# Altium PCB PCM2706 Bus Powered USB DAC 2.PcbDoc
Units mil, origin at the board's own origin, x right, y up, seen from the top; angles counter-clockwise.
Board outline 6000 x 4000 mil, 2 copper layers (Top Layer, Bottom Layer); 37 components, 30 nets, 111 pads, 16 vias.
Unrouted connection lines stored in the file: 46.
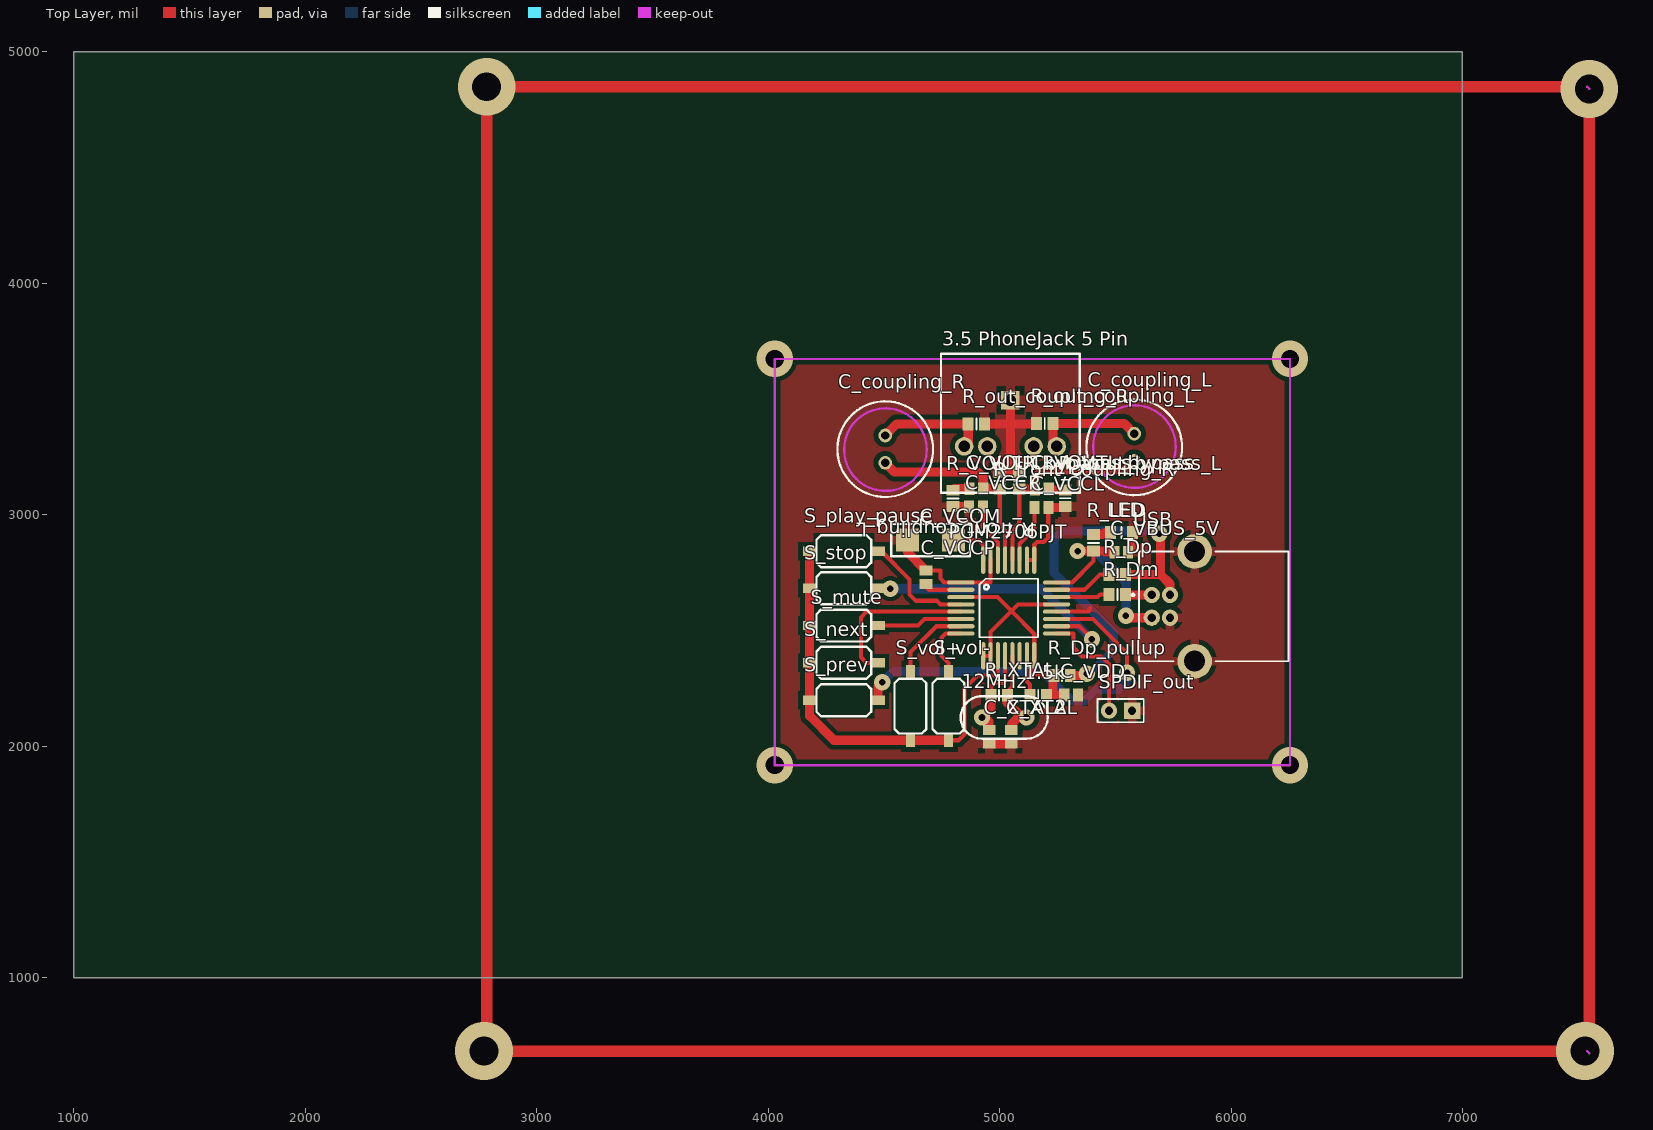
[diagram p0: Top Layer view]
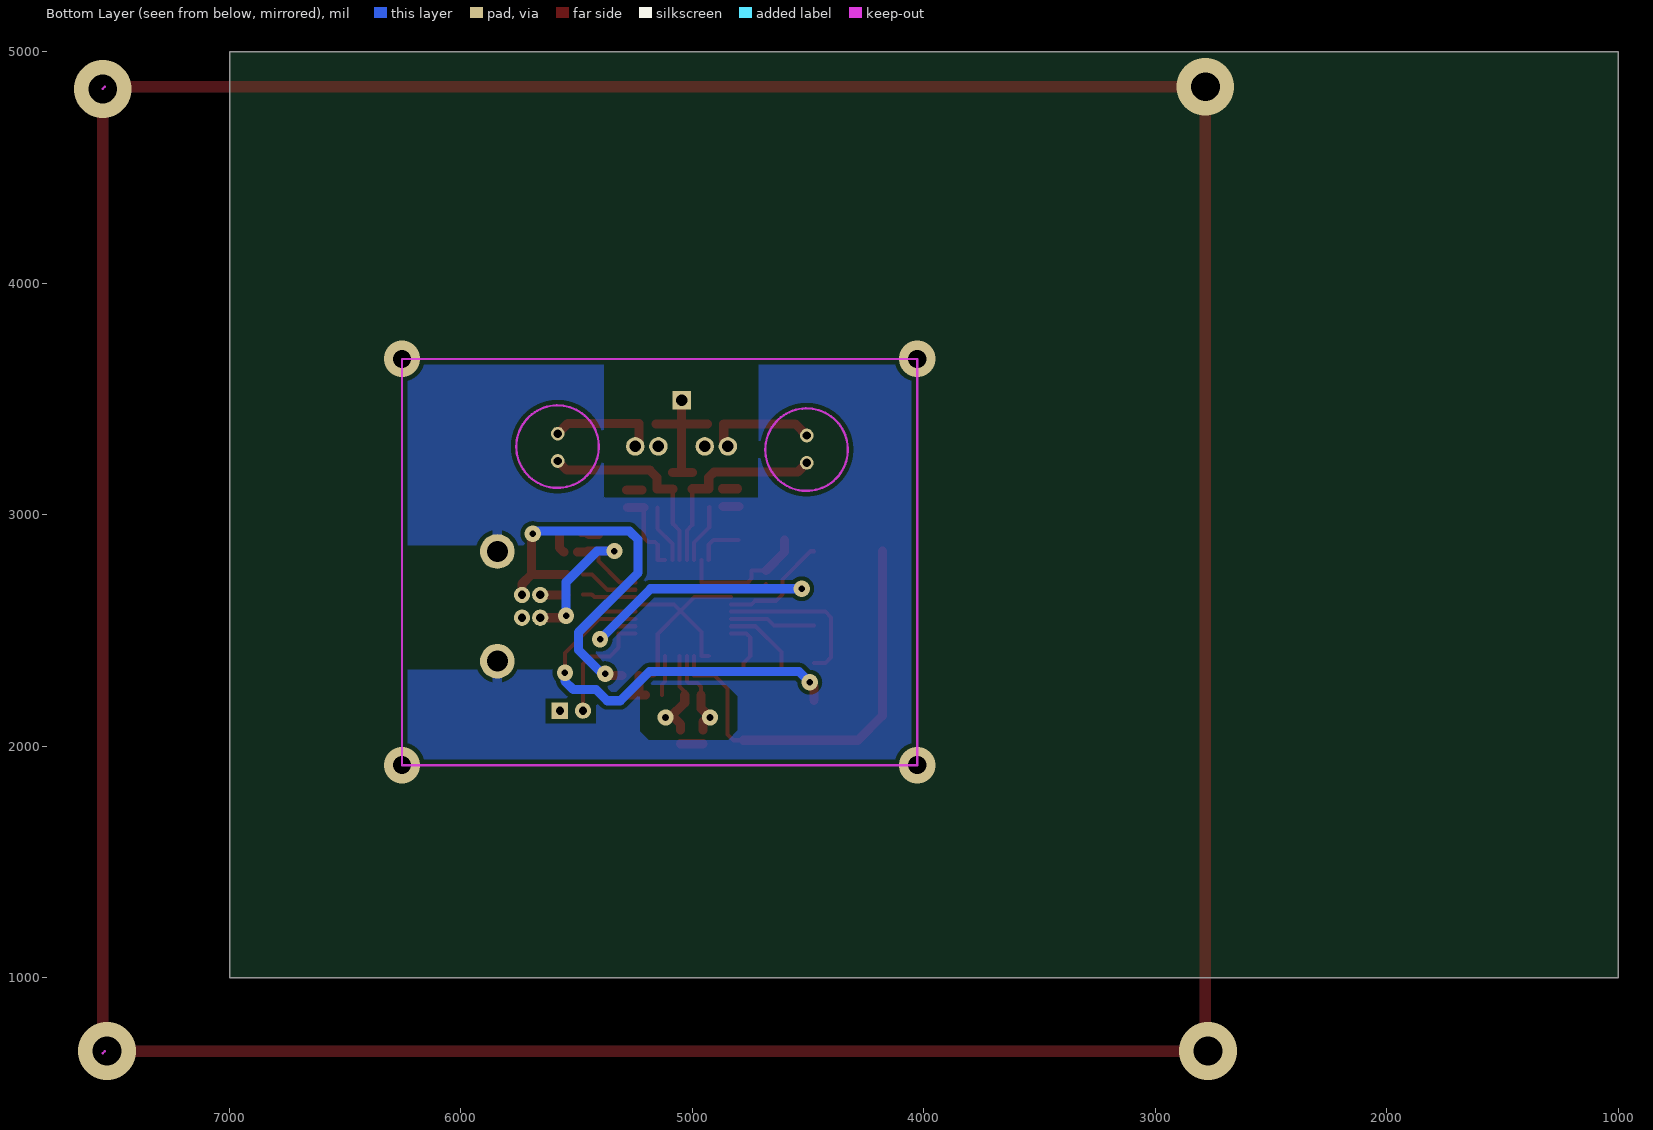
[diagram p1: Bottom Layer view, seen from below]

## Layer stack, top to bottom
Top Layer: signal copper 1.4
Dielectric: dielectric 12.6, FR-4, Dk 4.8
Bottom Layer: signal copper 1.4

## Board outline
1000,1000 7000,1000 7000,5000 1000,5000

## Design rules (kind name [scope] priority, off if disabled: settings)
Clearance [All] p1: gap=20
PlaneConnect [All] p1: planeconnectstyle=Relief reliefexpansion=20 reliefentries=4 reliefconductorwidth=20 reliefairgap=20
PolygonConnect [All] p1: connectstyle=Relief reliefconductorwidth=40 reliefentries=4 polygonreliefangle="90 Angle"
RoutingVias [All] p1: holewidth=35 width=70 viastyle="Through Hole" minholewidth=35 minwidth=70 maxholewidth=35 maxwidth=70
SilkscreenOverComponentPads [All] p1: minsilkscreentomaskgap=10
SolderMaskExpansion [All] p1: expansion=4
Width [All] p1: maxlimit=17.72 minlimit=15 preferedwidth=17.72
26 further rules are at their usual default settings.

## Components (designator, comment, footprint, x,y, rotation, side; value= is the part's Value field where it differs from the comment)
1.5k "R_DT_pullup" 6-0805_N 5167,2220 r180 top
"3.5 PhoneJack 5 Pin" "3.5 PhoneJack 5 Pin" "3.5 PhoneJack 5 Pin" 5047,3495 r90 top
12MHz "XTAL" "12MHz Crystal OSC through hole" 5020,2124 r0 top
C_coupling_L "Cap Pol1" RB5-10.5_narrowed 5582,3291 r90 top
C_coupling_R "Cap Pol1" RB5-10.5_narrowed 4506,3283 r90 top
C_VBUS_5V "" C0805 5526,2838 r0 top
C_VCCL "" C0805 5181,3031 r0 top
C_VCCP "" C0805 4682,2729 r90 top
C_VCCR "" C0805 4898,3034 r180 top
C_VCOM "" "Tantalum 6032-28 case C kemet" 4702,2890 r180 top
C_VDD "" C0805 5309,2221 r0 top
C_VOUTL_bypass "" C0805 5183,3111 r0 top
C_VOUTR_bypass "" C0805 4900,3112 r180 top
C_XTAL "" C0805 5051,2040 r270 top
C_XTAL2 "" C0805 4955,2040 r270 top
LED "" 6-0805_N_enlarge 5527,2923 r0 top
PCM2706PJT "PCM2706PJT" PCM2706PJT_2 4833,2707 r0 top
R_Dm "22" 6-0805_N 5509,2655 r180 top
R_Dp "22" 6-0805_N 5509,2742 r180 top
R_Dp_pullup "1.5k" 6-0805_N 5270,2305 r0 top
R_front_coupling_L "3.3k" 6-0805_N 5085,3146 r270 top
R_front_coupling_R "3.3k" 6-0805_N 5001,3146 r270 top
R_LED "330" 6-0805_N 5406,2878 r90 top
R_out_coupling_L "3.3k" 6-0805_N 5195,3394 r0 top
R_out_coupling_R "3.3k" 6-0805_N 4900,3392 r180 top
R_Vout_bypass_L "15" 6-0805_N 5284,3071 r270 top
R_VOUTR_bypass "15" 6-0805_N 4799,3070 r90 top
R_XTAL "1M" 6-0805_N 4998,2220 r180 top
S_mute "TACT Switch SMD" "TACT Switch SMD" 4327,2521 r0 top
S_next "TACT Switch SMD" "TACT Switch SMD" 4327,2360 r0 top
S_play_pause "TACT Switch SMD" "TACT Switch SMD" 4327,2842 r0 top
S_prev "TACT Switch SMD" "TACT Switch SMD" 4327,2198 r180 top
S_stop "TACT Switch SMD" "TACT Switch SMD" 4327,2682 r180 top
S_vol+ "TACT Switch SMD" "TACT Switch SMD" 4615,2173 r90 top
S_vol- "TACT Switch SMD" "TACT Switch SMD" 4779,2173 r90 top
SPDIF_out "Header 2" HDR1X2 5573,2153 r180 top
USB "USB B type" USB2.5-2H4D 5697,2604 r0 top

## Footprints (in the part's own frame and the unit in brackets; to place one, negate y for a bottom-side part, rotate by r counter-clockwise, add the part's x,y. Pads: shape width x height; smd on the part's side, far side on the other; paste and mask are expansions set on the pad)
"3.5 PhoneJack 5 Pin" [mil] "3.5 PhoneJack 5 Pin"
  rect 80x80 hole 50: COM(0,0)
  round 80 hole 50: L_NC(-200,-100) L_NO(-200,-200) R_NC(-200,100) R_NO(-200,200)
  silkscreen extent -400,-300 200,300
6-0805_N [mm] "Chip Resistor, Body 2.0x1.2mm, IPC Medium Density"
  rect 1.2x1.4 smd: 1(-0.9,0) 2(0.9,0)
  silkscreen extent 0,-0.6 0,0.6, body extent -1.07,-0.7 1.07,0.7, height 0.7
6-0805_N_enlarge [mm] "Chip Resistor, Body 2.0x1.2mm, IPC Medium Density"
  rect 1.2x1.4 smd: 1(-1.219,0) 2(1.219,0)
  silkscreen extent 0,-0.6 0,0.6, body extent -1.07,-0.7 1.07,0.7, height 0.7
"12MHz Crystal OSC through hole" [mil]
  round 70 hole 30: 1(-96.06,0) 2(96.06,0)
  silkscreen extent -188,-92 188,92
C0805 [mm] "Chip Capacitor, Body 2.0x1.3mm, IPC High Density"
  rect 1.1x1.4 smd: 1(-0.75,0) 2(0.75,0)
  body extent -1.1,-0.72 1.1,0.72, height 1.4
HDR1X2 [mil] "Connector; Header; 2 Position"
  rect 70x70 hole 35: 1(0,0)
  round 70 hole 35: 2(100,0)
  silkscreen extent -50,-50 150,50
PCM2706PJT_2 [mm]
  oval 3x0.45 smd: 1(0,0) 2(0,-0.8) 3(0,-1.6) 4(0,-2.4) 5(0,-3.2) 6(0,-4) 7(0,-4.8) 8(0,-5.6) 17(10.5,-5.6) 18(10.5,-4.8) 19(10.5,-4) 20(10.5,-3.2) 21(10.5,-2.4) 22(10.5,-1.6) 23(10.5,-0.8) 24(10.5,0)
  oval 0.45x3 smd: 9(2.45,-8.05) 10(3.25,-8.05) 11(4.05,-8.05) 12(4.85,-8.05) 13(5.65,-8.05) 14(6.45,-8.05) 15(7.25,-8.05) 16(8.05,-8.05) 25(8.05,2.45) 26(7.25,2.45) 27(6.45,2.45) 28(5.65,2.45) 29(4.85,2.45) 30(4.05,2.45) 31(3.25,2.45) 32(2.45,2.45)
  silkscreen extent 2.03,-6.02 8.47,0.41
RB5-10.5_narrowed [mm] "Capacitor (Radial); 2 Leads"
  round 1.5 hole 0.9: 1(-1.5,0) 2(1.5,0)
  silkscreen extent -5.25,-5.25 5.25,5.25
"TACT Switch SMD" [mm]
  rect 1.5x1 smd: 1(-3.75,0) 2(3.75,0)
  silkscreen extent -3,-1.75 3,1.75
"Tantalum 6032-28 case C kemet" [mm]
  rect 2.55x2.5 smd: 1(-2.525,0) 2(2.525,0)
  silkscreen extent -4.32,-1.78 4.32,1.78
USB2.5-2H4D [mm] "Connector; USB1.1, Type B, Thru-Hole; 4 Position; Right Angle"
  round 1.778 hole 0.92: 1(-1,1.25) 2(-1,-1.25) 3(1,-1.25) 4(1,1.25)
  round 3.8 hole 2.3: 5(3.71,6.02) 6(3.71,-6.02)
  silkscreen extent -3.18,-6.02 13.99,6.02, body extent -2.41,-6.02 13.99,6.02, height 11.1

## Part data
1.5k R_Dm R_Dp R_Dp_pullup R_front_coupling_L R_front_coupling_R R_LED R_out_coupling_L R_out_coupling_R R_Vout_bypass_L R_VOUTR_bypass R_XTAL: library part "Res Thermal", "Thermistor"
12MHz: "Crystal Oscillator"
C_coupling_L C_coupling_R: "Polarized Capacitor (Radial)"
C_VBUS_5V C_VCCL C_VCCP C_VCCR C_VCOM C_VDD C_VOUTL_bypass C_VOUTR_bypass C_XTAL C_XTAL2: library part "Cap Pol3", "Polarized Capacitor (Surface Mount)"
LED: library part LED2, "Typical RED, GREEN, YELLOW, AMBER GaAs LED"
SPDIF_out: "Header, 2-Pin"

## Via types
v1: diameter 70, hole 28, Top Layer to Bottom Layer, 8 vias
v2: diameter 250, hole 125, Top Layer to Bottom Layer, 4 vias
v3: diameter 157.48, hole 78.74, Top Layer to Bottom Layer, 4 vias

## Nets (pads, with @x,y where several pads share a name; then routed paths per layer and width w, separated by ;. In a path a pad name is that pad's centre, name@x,y a point inside that pad or via, vN(x,y) a via of type N, cw(c..) or ccw(c..) an arc to the next point about the centre after c; other vN are vias at no path point)
GND: "3.5 PhoneJack 5 Pin.COM" C_VBUS_5V.2 C_VCCL.2 C_VCCP.2 C_VCCR.2 C_VCOM.2 C_VDD.2 C_XTAL2.2 C_XTAL.2 LED.2 PCM2706PJT.1 PCM2706PJT.20 PCM2706PJT.25 PCM2706PJT.26 PCM2706PJT.31 R_front_coupling_L.1 R_front_coupling_R.1 R_out_coupling_L.1 R_out_coupling_R.1 R_Vout_bypass_L.2 R_VOUTR_bypass.1 SPDIF_out.1 USB.3 USB.5 USB.6 | length 1399.5
  Top Layer w17.72: 4761,2707 PCM2706PJT.1 4960.95,2707 PCM2706PJT.31 ; PCM2706PJT.20 5387,2581.02 5387,2591 5393,2597
  Top Layer w39.37: R_VOUTR_bypass.1 C_VCCR.2@4867.9,3034.57 ; R_out_coupling_R.1 R_out_coupling_L.1@5157.57,3392 ; C_XTAL2.2 C_XTAL.2 ; R_front_coupling_R.1 R_front_coupling_L.1 ; 5047,3184 5047,3495 ; C_VCCL.2 R_Vout_bypass_L.2@5279.43,3031 ; C_VBUS_5V.2 5575,2857.47 LED.2
Net1.5k_2: 1.5k.2 PCM2706PJT.15
"Net3.5 PhoneJack 5 Pin_L_NO": "3.5 PhoneJack 5 Pin.L_NO" C_coupling_L.2 R_out_coupling_L.2 | length 475.6
  Top Layer w39.37: 5247,3295 5230.43,3311.57 R_out_coupling_L.2 5538.06,3394 C_coupling_L.2
"Net3.5 PhoneJack 5 Pin_R_NO": "3.5 PhoneJack 5 Pin.R_NO" C_coupling_R.2 R_out_coupling_R.2 | length 483.5
  Top Layer w39.37: C_coupling_R.2 4555.94,3392 R_out_coupling_R.2 4864.57,3312.57 4847,3295
Net12MHz_1: 12MHz.1 C_XTAL2.1 PCM2706PJT.12 R_XTAL.2
Net12MHz_2: 12MHz.2 C_XTAL.1 PCM2706PJT.13 R_XTAL.1
NetC_coupling_L_1: C_coupling_L.1 C_VOUTL_bypass.1 PCM2706PJT.28 R_front_coupling_L.2 | length 895.6
  Top Layer w17.72: PCM2706PJT.28 5055.44,2931.44 5085,2961 R_front_coupling_L.2
  Top Layer w39.37: R_front_coupling_L.2 C_VOUTL_bypass.1@5153.04,3110.57 ; C_VOUTL_bypass.1 5153.47,3161.47 5184.57,3192.57 5542.63,3192.57 C_coupling_L.1
NetC_coupling_R_1: C_coupling_R.1 C_VOUTR_bypass.1 PCM2706PJT.29 R_front_coupling_R.2 | length 887.6
  Top Layer w17.72: R_front_coupling_R.2 5001,2955 5023.95,2932.05 PCM2706PJT.29
  Top Layer w39.37: C_coupling_R.1 4545.37,3184.57 4906.43,3184.57 4929.53,3161.47 C_VOUTR_bypass.1 4999.57,3112 R_front_coupling_R.2
NetC_VBUS_5V_1: C_VBUS_5V.1 PCM2706PJT.24 R_LED.1 USB.2
NetC_VCCL_1: C_VCCL.1 PCM2706PJT.27
NetC_VCCP_1: C_VCCP.1 PCM2706PJT.2
NetC_VCCR_1: C_VCCR.1 PCM2706PJT.30
NetC_VCOM_1: C_VCOM.1 PCM2706PJT.32
NetC_VOUTL_bypass_2: C_VOUTL_bypass.2 R_Vout_bypass_L.1
NetC_VOUTR_bypass_2: C_VOUTR_bypass.2 R_VOUTR_bypass.2
NetLED_1: LED.1 R_LED.2 | length 76.5
  Top Layer w39.37: R_LED.2@5406,2914.43 5447.43,2914.43 5456,2923 LED.1
NetPCM2706PJT_4: PCM2706PJT.4 S_play_pause.2
NetPCM2706PJT_5: PCM2706PJT.5 S_next.2
NetPCM2706PJT_6: PCM2706PJT.6 S_mute.2
NetPCM2706PJT_7: PCM2706PJT.7 S_vol+.2
NetPCM2706PJT_8: PCM2706PJT.8 S_vol-.2
NetPCM2706PJT_11: PCM2706PJT.11 S_mute.1 S_next.1 S_play_pause.1 S_prev.2 S_stop.2 S_vol+.1 S_vol-.1
NetPCM2706PJT_17: PCM2706PJT.17 SPDIF_out.2
NetPCM2706PJT_18: PCM2706PJT.18 S_stop.1
  other v1: 4528,2680
NetPCM2706PJT_19: PCM2706PJT.19 S_prev.1
NetPCM2706PJT_22: PCM2706PJT.22 R_Dm.2
NetPCM2706PJT_23: PCM2706PJT.23 R_Dp.2
NetR_Dm_1: R_Dm.1 USB.1
NetR_Dp_1: R_Dp.1 R_Dp_pullup.2 USB.4
VCC: 1.5k.1 C_VDD.1 PCM2706PJT.3 PCM2706PJT.9 PCM2706PJT.10 PCM2706PJT.16 PCM2706PJT.21 R_Dp_pullup.1
pads on no net: "3.5 PhoneJack 5 Pin.L_NC" "3.5 PhoneJack 5 Pin.R_NC" PCM2706PJT.14
copper on no net: | length 32442.7
  Top Layer w10: 4799,3105.43 4805.57,3112 ; 4917.94,2143 4943,2143 ; 4927,2127.06 4927,2143 ; 5046,3391.5 5047,3392.5 ; 5130.87,2220.7 5131.57,2220 ; v1(5399,2462) v1@5399,2464
  Top Layer w17.72: 4474.64,2360 4425,2360 4401,2384 4401,2556 4426.02,2581.02 4833,2581.02 ; 4474.64,2521 4648,2521 4676.52,2549.52 4833,2549.52 ; 4474.64,2842 4489,2842 4611,2720 4611,2656 4639,2628 4730,2628 4745.49,2612.51 4833,2612.51 ; 4615,2320.64 4615,2406 4727.02,2518.02 4833,2518.02 ; 4682,2699.47 4687.99,2693.48 4687.99,2681.5 4693.98,2675.5 4833,2675.5 ; 4682,2758.53 4744.47,2758.53 4744.47,2723.53 4761,2707 ; 4779,2025.36 4823.36,2025.36 4848,2050 4848,2248 4905,2305 4992.45,2305 4992.45,2390.07 ; 4779,2320.64 4779,2360 4750,2389 4750,2469 4767.53,2486.53 4833,2486.53 ; 4801.41,2890 4910,2890 4929.46,2870.54 4929.46,2803.46 ; 4833,2644.01 4990.99,2644.01 5051.5,2583.5 5149.93,2485.07 5149.93,2390.07 5149.93,2322.07 5167,2305 5231,2305 ; 4927.53,3034 4927.53,2944 4992.45,2879.08 4992.45,2803.46 ; 4929.46,2390.07 4960.95,2390.07 4960.95,2492.95 5044.5,2576.5 5080.51,2612.51 5246.39,2612.51 ; 4962.57,2220 4962.57,2256.57 4979,2273 5017,2273 5023.95,2279.95 5023.95,2390.07 ; 5033.43,2220 5033.43,2236.43 5055.44,2258.44 5055.44,2390.07 ; 5086.94,2803.46 5086.94,2874.47 5151.47,2939 5151.47,3031 ; 5118.43,2390.07 5118.43,2278.57 5130.87,2266.13 5130.87,2220.7 ; 5118.43,2803.46 5149.93,2803.46 5149.93,2869.93 5162,2882 5191,2882 5210.53,2901.53 5210.53,3031 5210.53,2993.53 ; 5246.39,2486.53 5319,2486.53 5319,2425 5356,2388 5416,2388 5439,2388 5473,2354 5473,2153 ; 5246.39,2518.02 5344.98,2518.02 v1@5399,2464 ; 5246.39,2549.52 5403.48,2549.52 5551,2402 v1(5551,2317) ; 5246.39,2644.01 5424.01,2644.01 5435,2655 5473.57,2655 ; 5246.39,2675.5 5367.5,2675.5 5434,2742 5473.57,2742 ; 5246.39,2707 5314,2707 5406,2799 5406,2842.57
  Top Layer w39.37: 4179.36,2842 4179.36,2682 4179.36,2521 4179.36,2360 4179.36,2198 4179.36,2130.64 4284.64,2025.36 4615,2025.36 4779,2025.36 ; 4474.64,2198 4474.64,2257.64 v1(4493,2276) ; 4602.59,2890 4602.59,2837.94 4682,2758.53 ; 4805.57,3112 4870.47,3112 ; 4927,2127.06 4930.1,2130.16 4955,2105.25 4955,2069.53 ; 4943,2143 4962.57,2162.57 4962.57,2220 ; 5033.43,2220 5033.43,2187.57 5097,2124 5081,2124 5051,2094 5051,2069.53 ; 5091.06,2124 5116.06,2124 ; 5203.43,2221 5239,2221 ; 5217.09,3106.43 5284,3106.43 ; 5231,2305 5231,2221 5279.47,2221 ; 5305.43,2305 v1@5369,2305 ; v1(5337,2843) 5405.57,2843 ; 5406,2842.57 5451.43,2842.57 5456,2838 5496.47,2838 ; 5544.43,2742 5695,2742 ; v1@5546,2554.79 5657.63,2554.79 ; 5546.22,2653.21 5657.63,2653.21 ; v1(5690,2918) v1@5695,2913 ; v1@5695,2912 5695,2742 ; 5736.37,2653.21 5736.37,2700.63 5695,2742
  Top Layer w50: v2@7539,682 2784,682 v2(2784,4849) v2@7539,4849 ; v2@7548,673 v2(7548,4840)
  Bottom Layer w39.37: v1(4493,2276) 4539,2322 5186,2322 5312,2196 5368,2196 5416,2244 5514,2244 5551,2281 v1(5551,2317) ; 4528,2680 5181,2680 v1(5399,2462) ; v1(5337,2843) 5412,2843 5546,2709 v1(5546,2563) ; v1(5377,2313) 5390,2313 5493,2416 5493,2491 5235,2749 5235,2892 5272,2929 5678,2929 v1@5690,2917
  other v2: 2772,682 7530,682
  other v3: 4029,1918 6255,1918 4029,3673 6255,3673

## Polygon pours and split planes (outlines as drawn)
GND on Top Layer "Keep-Out Layer-No Net" (solid, pour order 2): 4050,3652 6234,3652 6234,1939 6231,1936 4050,1936
GND on Bottom Layer "Keep-Out Layer-No Net" (solid, remove dead copper, pour order 4): 4049,3655 6236,3655 6236,1936 4049,1936

## Keep-outs
Keep-Out Layer:
  circle w10: c5582.72,3294 r178.28
  circle w10: c4506.72,3281 r178.28
  lines w10: 7539,682 7548,673 ; 7539,4849 7548,4840 ; 4029,1918 4029,1921 4029,3673 6255,3673 6255,1918 4029,1918

## Other copper
Top Layer:
  pour cut-out: 5013,3085 5070,3085 5071,3086 5071,2937 5016,2937 5011,2942
  pour cut-out: 5455,2971 5456,2970 5548,2970 5548,2880 5455,2880
  pour cut-out: 4672.79,2959.21 4871.61,2959.21 4871,2958.61 4871,2825 4677,2825 4672.79,2820.79
  pour cut-out: 4750,2895 5330,2895 5330,2306 4750,2306
  pour cut-out: 4197,2919 4459,2919 4460,2119 4197,2119
  pour cut-out: 4532,2302 4860,2302 4860,2039 4532,2039
Bottom Layer:
  pour cut-out: 5582,2868 5580,2330 6249,2330 6242,2334 6243,2859 6244,2868
  pour cut-out: 4851,2264 5180,2265 5228,2215 5228,2065 5188,2026 4845,2026 4804,2069 4804,2216
  pour cut-out: 4714,3650 5384,3650 5384,3073 5386,3076 4720,3073 4714.83,3073.22
  pour cut-out: 5416,2097 5416,2206 5635,2206 5635,2097